# Altium PCB versterkerSchematic.PcbDoc
Units mil, origin at the board's own origin, x right, y up, seen from the top; angles counter-clockwise.
Board outline 2250 x 2750 mil, 2 copper layers (Top Layer, Bottom Layer); 64 components, 46 nets, 147 pads, 2 vias.
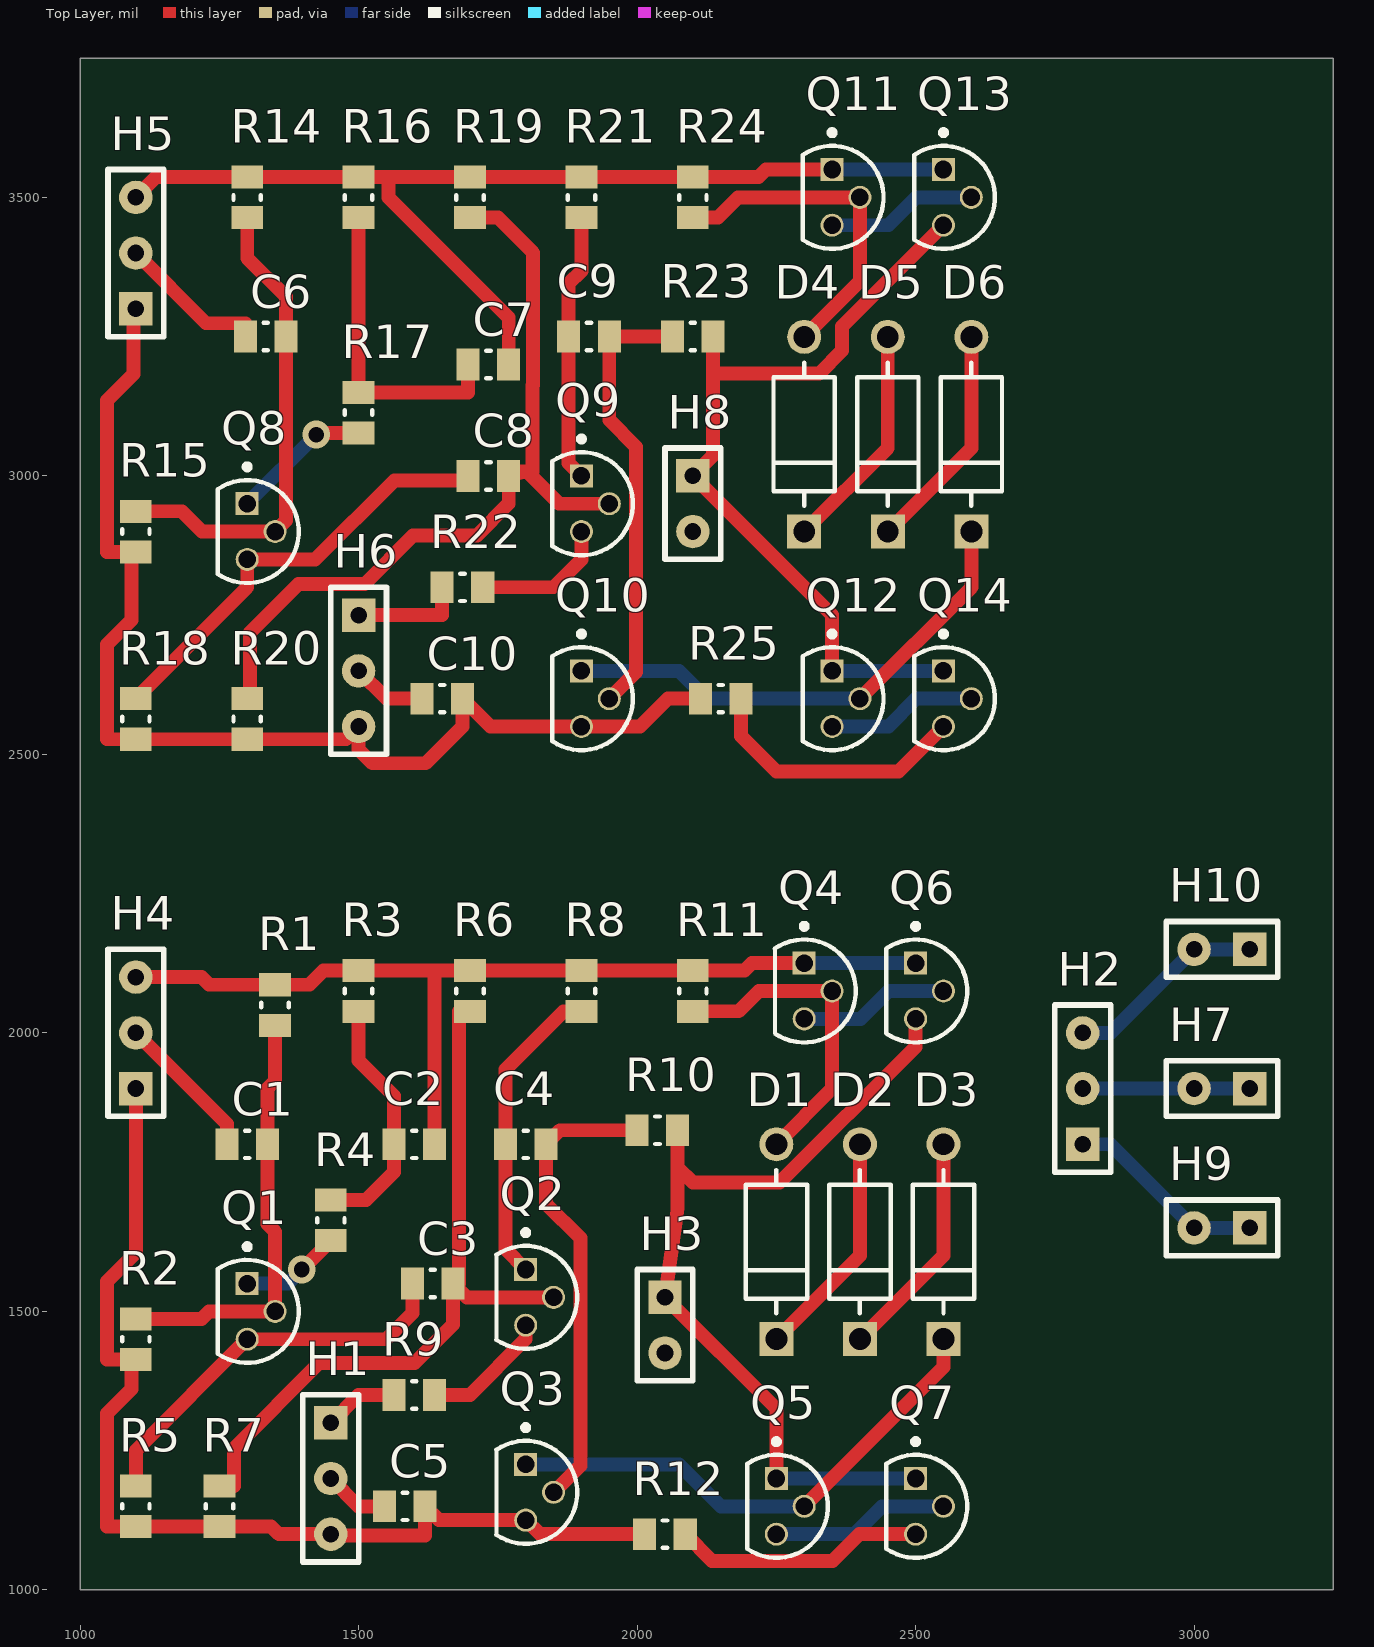
[diagram p0: Top Layer view]
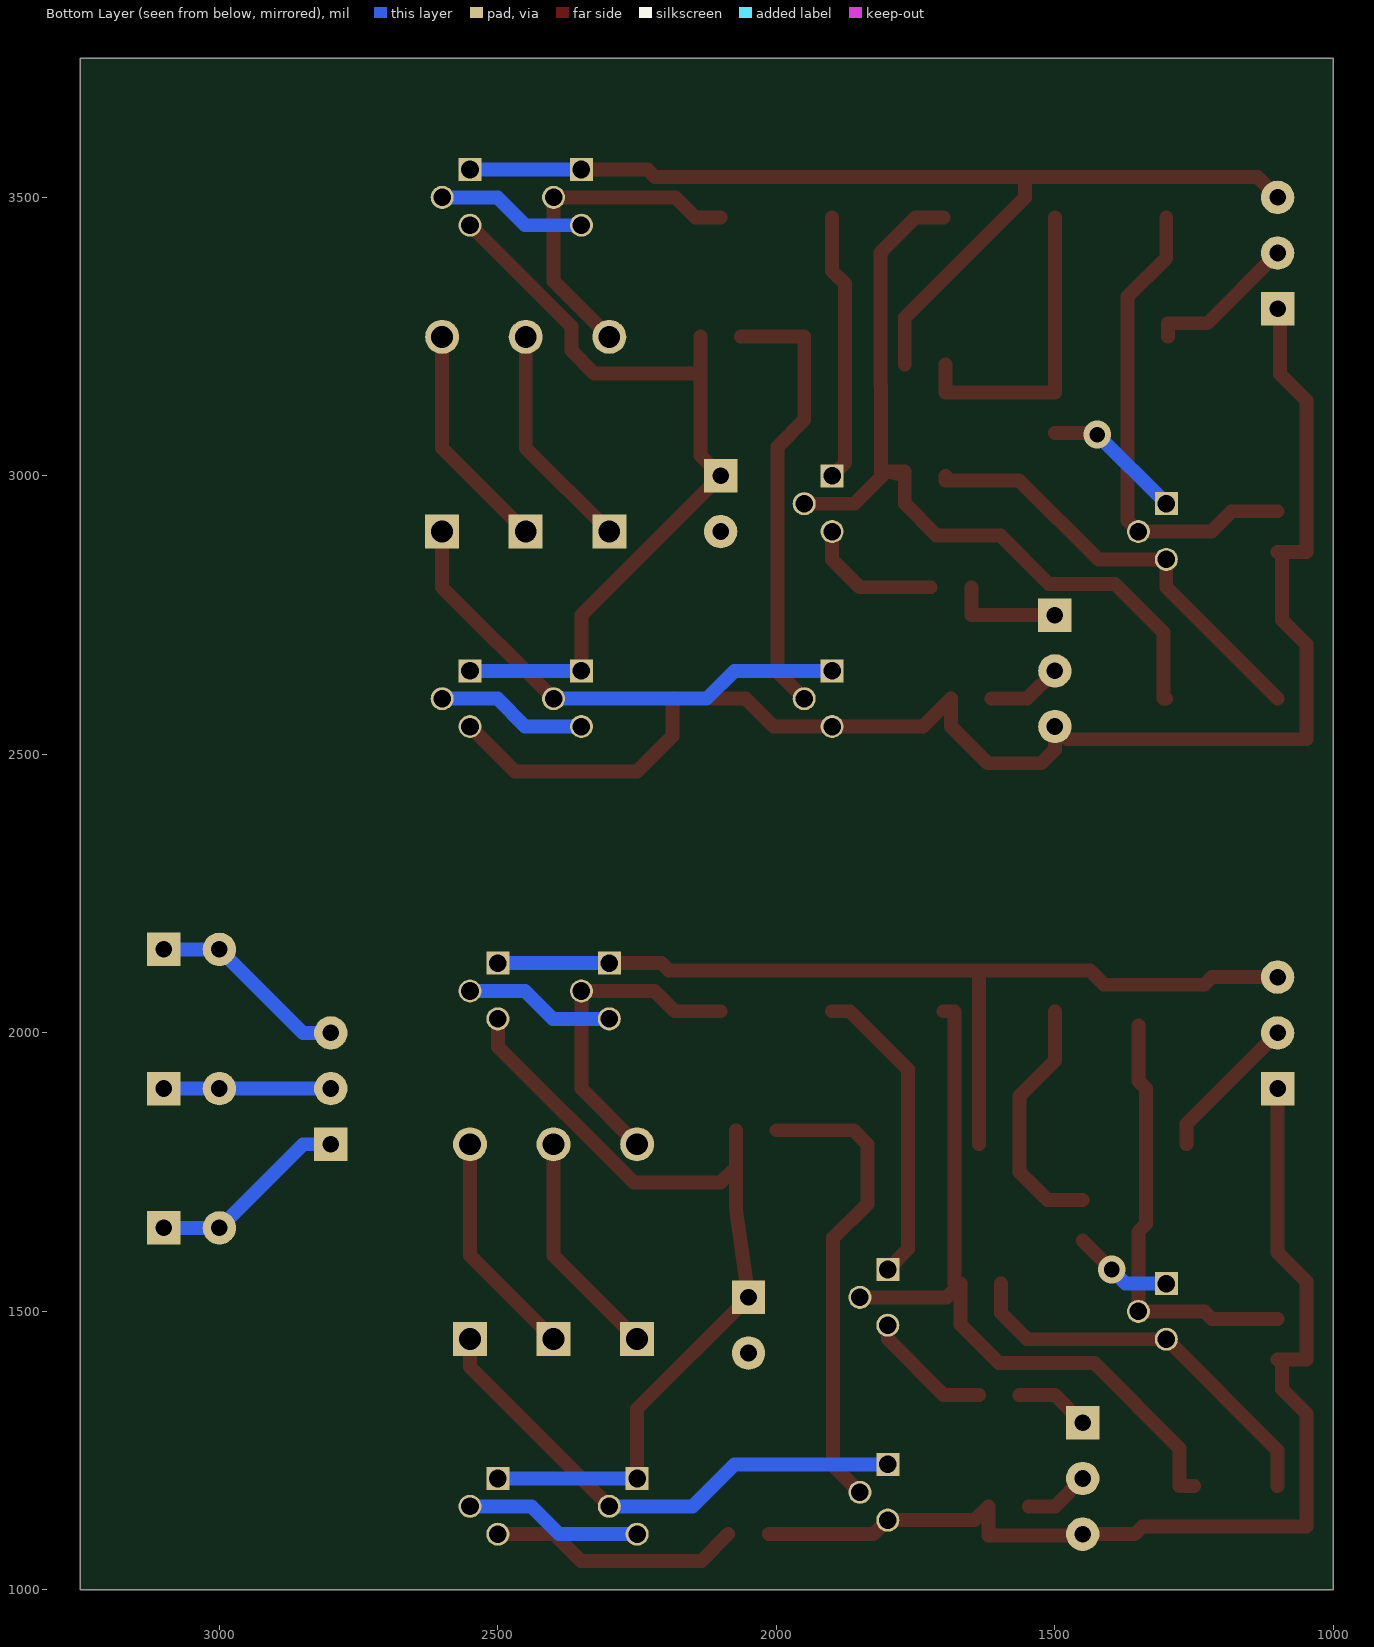
[diagram p1: Bottom Layer view, seen from below]

## Layer stack, top to bottom
Top Solder: solder mask 0.4, Solder Resist, Dk 3.5
Top Layer: signal copper 1.4
Dielectric 1: dielectric 12.6, FR-4, Dk 4.8
Bottom Layer: signal copper 1.4
Bottom Solder: solder mask 0.4, Solder Resist, Dk 3.5

## Board outline
1000,1000 3250,1000 3250,3750 1000,3750

## Design rules (kind name [scope] priority, off if disabled: settings)
Clearance [All] p1: gap=10 ignorepadtopadclearanceinfootprint=FALSE except(0: Arc-Hole Track-Hole SMDPad-Hole THPad-Hole Via-Hole Fill-Hole Poly-Hole Region-Hole Text-Hole)
PolygonConnect [All] p1: connectstyle=Relief reliefconductorwidth=10 reliefentries=4 polygonreliefangle="90 Angle" airgapwidth=10
RoutingVias [All] p1: holewidth=28 width=50 viastyle="Through Hole" minholewidth=28 minwidth=50 maxholewidth=28 maxwidth=50
SolderMaskExpansion [All] p1: expansion=4 istentingtop=FALSE
Width [All] p1: maxlimit=30 minlimit=20 preferedwidth=25 minimp=50.000000 maximp=50.000000 favimp=50.000000
30 further rules are at their usual default settings.

## Classes and differential pairs
component class versterker_R: C6 C7 C8 C9 C10 D4 D5 D6 H5 H6 H8 Q8 Q9 Q10 Q11 Q12 Q13 Q14 R14 R15 R16 R17 R18 R19 R20 R21 R22 R23 R24 R25
component class versterker_L: C1 C2 C3 C4 C5 D1 D2 D3 H1 H3 H4 Q1 Q2 Q3 Q4 Q5 Q6 Q7 R1 R2 R3 R4 R5 R6 R7 R8 R9 R10 R11 R12
component class aansluiting: H2 H7 H9 H10

## Components (designator, comment, footprint, x,y, rotation, side; value= is the part's Value field where it differs from the comment)
C1 "10uF" "capacitor SMD" 1300,1800 r0 top
C2 "10uF" "capacitor SMD" 1600,1800 r0 top
C3 "10uF" "capacitor SMD" 1633.07,1550 r0 top
C4 "10uF" "capacitor SMD" 1800,1800 r0 top
C5 "100uF" "capacitor SMD" 1583.07,1150 r0 top
C6 "10uF" "capacitor SMD" 1333.07,3250 r0 top
C7 "10uF" "capacitor SMD" 1733.07,3200 r0 top
C8 "10uF" "capacitor SMD" 1733.07,3000 r0 top
C9 "10uF" "capacitor SMD" 1913.58,3250 r0 top
C10 "100uF" "capacitor SMD" 1650,2600 r0 top
D1 "1N4007" diode 2250,1625.2 r90 top value=15pF
D2 "1N4007" diode 2400,1625.2 r90 top value=15pF
D3 "1N4007" diode 2550,1625.2 r90 top value=15pF
D4 "1N4007" diode 2300,3074.8 r90 top value=15pF
D5 "1N4007" diode 2450,3074.8 r90 top value=15pF
D6 "1N4007" diode 2600,3074.8 r90 top value=15pF
H1 "header 1x3" "header 1x3" 1450,1200 r270 top
H2 "aansluiting Voeding" "header 1x3" 2800,1900 r90 top
H3 "Vout" "header 1x2" 2050,1525.2 r270 top
H4 "voeding" "header 1x3" 1100,2000 r90 top
H5 "voeding" "header 1x3" 1100,3400 r90 top
H6 "header 1x3" "header 1x3" 1500,2650 r270 top
H7 "-15V" "header 1x2" 3100,1900 r180 top
H8 "Vout" "header 1x2" 2100,3000 r270 top
H9 "+15V" "header 1x2" 3100,1650 r180 top
H10 "GRND" "header 1x2" 3100,2150 r180 top
Q1 "2N3906" transistor 1300,1500 r270 top
Q2 "2N3904" transistor 1800,1525.2 r270 top
Q3 "2N3904" transistor 1800,1175.2 r270 top
Q4 "2N3904" transistor 2300,2075.2 r270 top
Q5 "2N3906" transistor 2250,1150 r270 top
Q6 "BC1135" transistor 2500,2075.2 r270 top
Q7 "BC135" transistor 2500,1150 r270 top
Q8 "2N3906" transistor 1300,2900 r270 top
Q9 "2N3904" transistor 1900,2950 r270 top
Q10 "2N3904" transistor 1900,2600 r270 top
Q11 "2N3904" transistor 2350,3500 r270 top
Q12 "2N3906" transistor 2350,2600 r270 top
Q13 "BC1135" transistor 2550,3500 r270 top
Q14 "BC135" transistor 2550,2600 r270 top
R1 "330K" "resistor smd" 1350,2050 r90 top
R2 "330K" "resistor smd" 1100,1450 r90 top
R3 "33K" "resistor smd" 1500,2075.2 r90 top
R4 "1.0K" "resistor smd" 1450,1663.58 r90 top
R5 "22K" "resistor smd" 1100,1150 r90 top
R6 "47K" "resistor smd" 1700,2075.2 r90 top
R7 "22K" "resistor smd" 1250,1150 r90 top
R8 "6.8K" "resistor smd" 1900,2075.2 r90 top
R9 "130E" "resistor smd" 1600,1350 r0 top
R10 "150E" "resistor smd" 2036.42,1825.2 r0 top
R11 "1.0K" "resistor smd" 2100,2075.2 r90 top
R12 "220E" "resistor smd" 2050,1100 r0 top
R14 "330K" "resistor smd" 1300,3500 r90 top
R15 "330K" "resistor smd" 1100,2900 r90 top
R16 "33K" "resistor smd" 1500,3500 r90 top
R17 "1.0K" "resistor smd" 1500,3113.58 r90 top
R18 "22K" "resistor smd" 1100,2563.58 r90 top
R19 "47K" "resistor smd" 1700,3500 r90 top
R20 "22K" "resistor smd" 1300,2563.58 r90 top
R21 "6.8K" "resistor smd" 1900,3500 r90 top
R22 "130E" "resistor smd" 1686.42,2800 r0 top
R23 "150E" "resistor smd" 2100,3250 r0 top
R24 "1.0K" "resistor smd" 2100,3500 r90 top
R25 "220E" "resistor smd" 2150,2600 r0 top

## Footprints (in the part's own frame and the unit in brackets; to place one, negate y for a bottom-side part, rotate by r counter-clockwise, add the part's x,y. Pads: shape width x height; smd on the part's side, far side on the other; paste and mask are expansions set on the pad)
"capacitor SMD" [mm] "Chip caacitor, 2-Leads, Body 2.00x1.25mm"
  rect 1.05x1.45 smd: 1(-0.925,0) 2(0.925,0)
  silkscreen extent -0.1,-0.62 0.1,0.62, body extent -1.1,-0.72 1.1,0.72, height 0.5
diode [mm]
  rect 1.55x1.55 hole 1 paste-2539.97 mask+0: 1(-4.44,0)
  round 1.55 hole 1 paste-2539.97 mask+0: 2(4.44,0)
  silkscreen extent -3.27,-1.4 3.27,1.4, body extent -5.32,-1.5 5.32,1.5, height 0.25
"header 1x2" [mil]
  rect 60x60 hole 30: 1(0,0)
  round 60 hole 30: 2(100,0)
  silkscreen extent -50,-50 150,50
"header 1x3" [mil]
  rect 60x60 hole 30: 1(-100,0)
  round 60 hole 30: 2(0,0) 3(100,0)
  silkscreen extent -150,-50 150,50
"resistor smd" [mm] "Chip Resistor, 2-Leads, Body 2.00x1.25mm, IPC Medium Density"
  rect 1.05x1.45 smd: 1(-0.925,0) 2(0.925,0)
  silkscreen extent -0.1,-0.62 0.1,0.62, body extent -1.1,-0.72 1.1,0.72, height 0.5
transistor [mm] "TO, 3-Leads, Body Dia 4.7mm, Pitch 1.27mm"
  rect 1.05x1.05 hole 0.8: 1(-1.27,0)
  round 1.05 hole 0.8: 2(0,1.27) 3(1.27,0)
  silkscreen extent -3.07,-1.34 2.35,2.35, body extent -2.35,-1.33 2.36,2.36, height 7.87

## Part data
C1 C2 C3 C4 C5 C6 C7 C8 C9 C10: library part "capacitor smd", Manufacturer=Kemet, Part Number=C0402C104K4RACTU
D1 D2 D3 D4 D5 D6: library part diode, "Rectifier diode 1000 V 1 A DO-41, ,", Capacitance=15pF, Forward Current=1A, Manufacturer=Diotec, Max Junction Temp=+175°C, Max Repetitive Reverse Voltage=1000V, Max Surge Forward Current=27A, Peak Reverse Current=5uA, Temperature="-50°C to +175°C", Temperature Range Low=-50°C, Automotive=No, Category=Diode, ComponentLink2Description=Datasheet, ComponentLink2URL=https://datasheet.octopart.com/1N4007-Diotec-datasheet-62346875.pdf, Device Class L1="Discrete Semiconductors", Device Class L2=Diodes, Device Class L3="Rectifier Diodes", Height=2.8mm, Ipc Land Pattern Name=DIOAD888W100L520D280, Lead Free=Yes, Manufacturer Part Number=1N4007, Octopart=https://octopart.com/1n4007-diotec-4040411, Package=1N4007, Reverse Voltage=1000V, RoHS=TRUE, Temperature Range High=+175°C
H1 H6: "slider https://benl.rs-online.com/web/p/potentiometers/7377789?cm_mmc=BE-PLA-DS3A-_-google-_-CSS_BE_NL_Passive_Components_Whoop-_-(BE:Whoop!)+Potentiometers-_-7377789&matchtype=&pla-475798367430&gad_source=1&gclid=CjwKCAjwzN-vBhAkEiwAYiO7oPuJbs9GCJj7CrvxiNsXjA7SlcJ2NwzZNKSjfO0eiH0Rvhaxga3QEBoC9gEQAvD_BwE&gclsrc=aw.ds"
H2 H4 H5: library part "header 1x3"
H3 H7 H8 H9 H10: library part "header 1x2"
Q1 Q5 Q8 Q12: library part "pnp transistor", "Amplifier Transistor, NPN Silicon, 3-Pin TO-92, Bulk Box", Manufacturer="On Semiconductor", PartNumber=BC547B, ComponentLink1Description="Manufacturer URL", ComponentLink1URL=http://www.onsemi.com/, ComponentLink2Description=Datasheet, ComponentLink2URL=http://www.onsemi.com/pub_link/Collateral/BC546-D.PDF, ComponentLink3Description="Package Specification", ComponentLink3URL=http://www.onsemi.cn/pub_link/Collateral/2N6426-D.PDF, DatasheetVersion="Rev. 7", fT Min (MHz)=150, IC Continuous (A)=0.1, Mounting Technology="Through Hole", PackageDescription="3-Pin Transistor Outline, Body 4.825 x 3.685 mm, Pitch 1.27 mm", PackageReference=TO-92-3-29-11_AM_SL, PackageVersion="Rev. AM", Packing="Bulk Box", Polarity=NPN, RoHS=FALSE
Q2 Q3 Q4 Q6 Q7 Q9 Q10 Q11 Q13 Q14: library part "npn transistor", "Amplifier Transistor, NPN Silicon, 3-Pin TO-92, Bulk Box", Manufacturer="On Semiconductor", PartNumber=BC547B, ComponentLink1Description="Manufacturer URL", ComponentLink1URL=http://www.onsemi.com/, ComponentLink2Description=Datasheet, ComponentLink2URL=http://www.onsemi.com/pub_link/Collateral/BC546-D.PDF, ComponentLink3Description="Package Specification", ComponentLink3URL=http://www.onsemi.cn/pub_link/Collateral/2N6426-D.PDF, DatasheetVersion="Rev. 7", fT Min (MHz)=150, IC Continuous (A)=0.1, Mounting Technology="Through Hole", PackageDescription="3-Pin Transistor Outline, Body 4.825 x 3.685 mm, Pitch 1.27 mm", PackageReference=TO-92-3-29-11_AM_SL, PackageVersion="Rev. AM", Packing="Bulk Box", Polarity=NPN, RoHS=FALSE
R1 R2 R3 R4 R5 R6 R7 R8 R9 R10 R11 R12 R14 R15 R16 R17 R18 R19 R20 R21 R22 R23 R24 R25: library part "resistor smd", Manufacturer="Vishay Dale", Part Number=CRCW08050000Z0EA

## Via types
v1: diameter 50, hole 28, Top Layer to Bottom Layer, 2 vias

## Nets (pads, with @x,y where several pads share a name; then routed paths per layer and width w, separated by ;. In a path a pad name is that pad's centre, name@x,y a point inside that pad or via, vN(x,y) a via of type N, cw(c..) or ccw(c..) an arc to the next point about the centre after c; other vN are vias at no path point)
GND: 
NetC1_1: C1.1 H4.2 | length 267.8
  Top Layer w25: H4.2 1263.58,1836.42 C1.1
NetC1_2: C1.2 Q1.2 R1.1 R2.2 | length 780.5
  Top Layer w25: R2.2 1218,1486.42 1231.58,1500 Q1.2 1350,1643 1336.42,1656.58 C1.2 1336.42,1900 1350,1913.58 R1.1
NetC2_1: C2.1 R3.1 R4.2 | length 449.4
  Top Layer w25: R4.2 1513.58,1700 1563.58,1750 C2.1 1563.58,1887 1500,1950.58 R3.1
NetC2_2: C2.2 H4.3 Q4.1 Q6.1 R1.2 R3.2 R6.2 R8.2 R11.2 | length 1733.3
  Top Layer w25: H4.3 1218,2100 1231.58,2086.42 R1.2 1412,2086.42 1437.2,2111.61 R3.2 1636.42,2111.61 ; C2.2 1636.42,2111.61 ; Q4.1 2206.58,2125.2 2193,2111.61 R11.2 R8.2 R6.2 1636.42,2111.61
  Bottom Layer w25: Q4.1 Q6.1
NetC3_1: C3.1 Q1.3 R5.2 | length 715.7
  Top Layer w25: R5.2 1100,1250 Q1.3 1550,1450 1596.65,1496.65 C3.1
NetC3_2: C3.2 Q2.2 R6.1 R7.2 | length 1362.8
  Top Layer w25: R7.2 1276,1186.42 1276,1254 1429,1407 1600,1407 1669.49,1476.49 C3.2 ; R6.1 1680,2038.78 1680,1550 C3.2 ; Q2.2 1694.29,1525.2 C3.2
NetC4_1: C4.1 Q2.1 R8.1 | length 553.9
  Top Layer w25: Q2.1 1763.58,1611.61 C4.1 1763.58,1934.36 1868,2038.78 R8.1
NetC4_2: C4.2 Q3.2 R10.1 | length 844.2
  Top Layer w25: Q3.2 1898,1223.2 1898,1631.42 1836.42,1693 C4.2 1861.61,1825.2 R10.1
NetC5_1: C5.1 H1.2 | length 117.4
  Top Layer w25: H1.2 1500,1150 C5.1
NetC5_2: C5.2 H1.3 H4.1 Q3.3 R2.1 R5.1 R7.1 R12.1 | length 1922.9
  Top Layer w25: R2.1 R2.1@1092,1413.58 ; H4.1 1100,1606 1048,1554 1048,1413.58 R2.1@1092,1413.58 ; R12.1 1825.2,1100 Q3.3 1644.29,1125.2 C5.2 1619.49,1098 1452,1098 H1.3 1356.58,1100 1343,1113.58 R7.1 R5.1 1048,1113.58 1048,1317 1092,1361 R2.1@1092,1413.58
NetC6_1: C6.1 H5.2 | length 272.8
  Top Layer w25: H5.2 1226,3274 1296.65,3274 C6.1
NetC6_2: C6.2 Q8.2 R14.1 R15.2 | length 865.5
  Top Layer w25: R15.2 1182.58,2936.42 1219,2900 Q8.2 1369.49,2919.49 C6.2 1369.49,3322 1300,3391.49 R14.1
NetC7_1: C7.1 R16.1 R17.2 | length 560.2
  Top Layer w25: R16.1 R17.2 1696.65,3150 C7.1
NetC7_2: C7.2 H5.3 Q11.1 Q13.1 R14.2 R16.2 R19.2 R21.2 R24.2 | length 1896.4
  Top Layer w25: H5.3 1136.42,3536.42 R14.2 R16.2 1554,3536.42 ; C7.2 1769.49,3284.51 1554,3500 1554,3536.42 ; Q11.1 2231.58,3550 2218,3536.42 R24.2 R21.2 R19.2 1554,3536.42
  Bottom Layer w25: Q11.1 Q13.1
NetC8_1: C8.1 Q8.3 R18.2 | length 796.3
  Top Layer w25: R18.2 1300,2800 Q8.3 1422,2850 1564,2992 1696.65,2992 C8.1
NetC8_2: C8.2 Q9.2 R19.1 R20.2 | length 1522.3
  Top Layer w25: R20.2 1305,2600 1305,2719 1392,2806 1511,2806 1598,2893 1712.49,2893 1769.49,2950 C8.2 ; R19.1 1750,3463.58 1813,3400.58 1813,3163 1812,3162 1812,3008 1802,3008 ; Q9.2 1860,2950 1802,3008 ; C8.2 1802,3008 ; C8.2 1769.49,3008 1802,3008
NetC9_1: C9.1 Q9.1 R21.1 | length 482.5
  Top Layer w25: Q9.1 1877.17,3022.83 C9.1 1877.17,3345 1900,3367.83 R21.1
NetC9_2: C9.2 Q10.2 R23.1 | length 803.3
  Top Layer w25: Q10.2 1998,2648 1998,3052 1950,3100 C9.2 R23.1
NetC10_1: C10.1 H6.2 | length 134.3
  Top Layer w25: H6.2 1550,2600 C10.1
NetC10_2: C10.2 H5.1 H6.3 Q10.3 R15.1 R18.1 R20.1 R25.1 | length 2112.1
  Top Layer w25: R15.1 R15.1@1092,2863.58 ; H5.1 1096,3300 1096,3183 1048,3135 1048,2863.58 R15.1@1092,2863.58 ; R25.1 2055,2600 2005,2550 Q10.3 1736.42,2550 C10.2 1686.42,2550 1620.42,2484 1525,2484 1500,2509 H6.3 1477.16,2527.16 R20.1 R18.1 1048,2527.16 1048,2697 1092,2741 R15.1@1092,2863.58
NetD1_1: D1.1 D2.2 | length 411.7
  Top Layer w25: D1.1 2400,1600.39 D2.2
NetD1_2: D1.2 Q4.2 R11.1 | length 581.7
  Top Layer w25: R11.1 2182,2038.78 2218.42,2075.2 Q4.2 2350,1900 D1.2
NetD2_1: D2.1 D3.2 | length 411.7
  Top Layer w25: D2.1 2550,1600.39 D3.2
NetD3_1: D3.1 Q3.1 Q5.2 | length 935.1
  Top Layer w25: Q5.2 2550,1400 D3.1
  Bottom Layer w25: Q3.1 2075,1225.2 2150.2,1150 Q5.2
NetD4_1: D4.1 D5.2 | length 411.7
  Top Layer w25: D4.1 2450,3050 D5.2
NetD4_2: D4.2 Q11.2 R24.1 | length 606.9
  Top Layer w25: R24.1 2145,3463.58 2181.42,3500 Q11.2 2400,3349.61 D4.2
NetD5_1: D5.1 D6.2 | length 411.7
  Top Layer w25: D5.1 2600,3050 D6.2
NetD6_1: D6.1 Q10.1 Q12.2 | length 903.6
  Top Layer w25: Q12.2 2600,2800 D6.1
  Bottom Layer w25: Q10.1 2075,2650 2125,2600 Q12.2
NetH1_1: H1.1 R9.1 | length 134.3
  Top Layer w25: H1.1 1500,1350 R9.1
NetH2_1: H2.1 H9.1 H9.2 | length 362.1
  Bottom Layer w25: H2.1 2850,1800 H9.2 H9.1
NetH2_2: H2.2 H7.1 H7.2 | length 300
  Bottom Layer w25: H2.2 H7.2 H7.1
NetH2_3: H2.3 H10.1 H10.2 | length 362.1
  Bottom Layer w25: H2.3 2850,2000 H10.2 H10.1
NetH3_1: H3.1 Q5.1 Q6.3 Q7.1 R10.2 | length 1549.3
  Top Layer w25: R10.2 2072.84,1758.16 ; Q5.1 2250,1325.2 H3.1 2072.84,1685.84 2072.84,1758.16 ; Q6.3 2500,1975 2256,1731 2100,1731 2072.84,1758.16
  Bottom Layer w25: Q5.1 Q7.1
NetH6_1: H6.1 R22.1 | length 200
  Top Layer w25: H6.1 1650,2750 R22.1
NetH8_1: H8.1 Q12.1 Q13.3 Q14.1 R23.2 | length 1467.6
  Top Layer w25: R23.2 2136.42,3184 ; Q12.1 2350,2750 H8.1 2136.42,3036.42 2136.42,3184 ; Q13.3 2368,3268 2368,3225 2327,3184 2136.42,3184
  Bottom Layer w25: Q12.1 Q14.1
NetQ1_1: Q1.1 R4.1 | length 182
  Top Layer w25: v1(1398,1575.16) R4.1
  Bottom Layer w25: Q1.1 1372.84,1550 v1(1398,1575.16)
NetQ2_3: Q2.3 R9.2 | length 230.2
  Top Layer w25: R9.2 1700,1350 1800,1450 Q2.3
NetQ4_3: Q4.3 Q6.2 | length 270.7
  Bottom Layer w25: Q4.3 2401,2025.2 2451,2075.2 Q6.2
NetQ5_3: Q5.3 Q7.2 | length 320.7
  Bottom Layer w25: Q5.3 2390,1100 2440,1150 Q7.2
NetQ7_3: Q7.3 R12.2 | length 453.3
  Top Layer w25: R12.2 2134.42,1052 2351,1052 2399,1100 Q7.3
NetQ8_1: Q8.1 R17.1 | length 252.7
  Top Layer w25: v1(1424,3074) 1427.16,3077.16 R17.1
  Bottom Layer w25: Q8.1 v1(1424,3074)
NetQ9_3: Q9.3 R22.2 | length 247.9
  Top Layer w25: R22.2 1850,2800 1900,2850 Q9.3
NetQ11_3: Q11.3 Q13.2 | length 270.7
  Bottom Layer w25: Q11.3 2451,3450 2501,3500 Q13.2
NetQ12_3: Q12.3 Q14.2 | length 270.7
  Bottom Layer w25: Q12.3 2451,2550 2501,2600 Q14.2
NetQ14_3: Q14.3 R25.2 | length 490.9
  Top Layer w25: R25.2 2186.42,2532.58 2250,2469 2469,2469 Q14.3
pads on no net: H3.2 H8.2